# Allegro board Motot control.brd
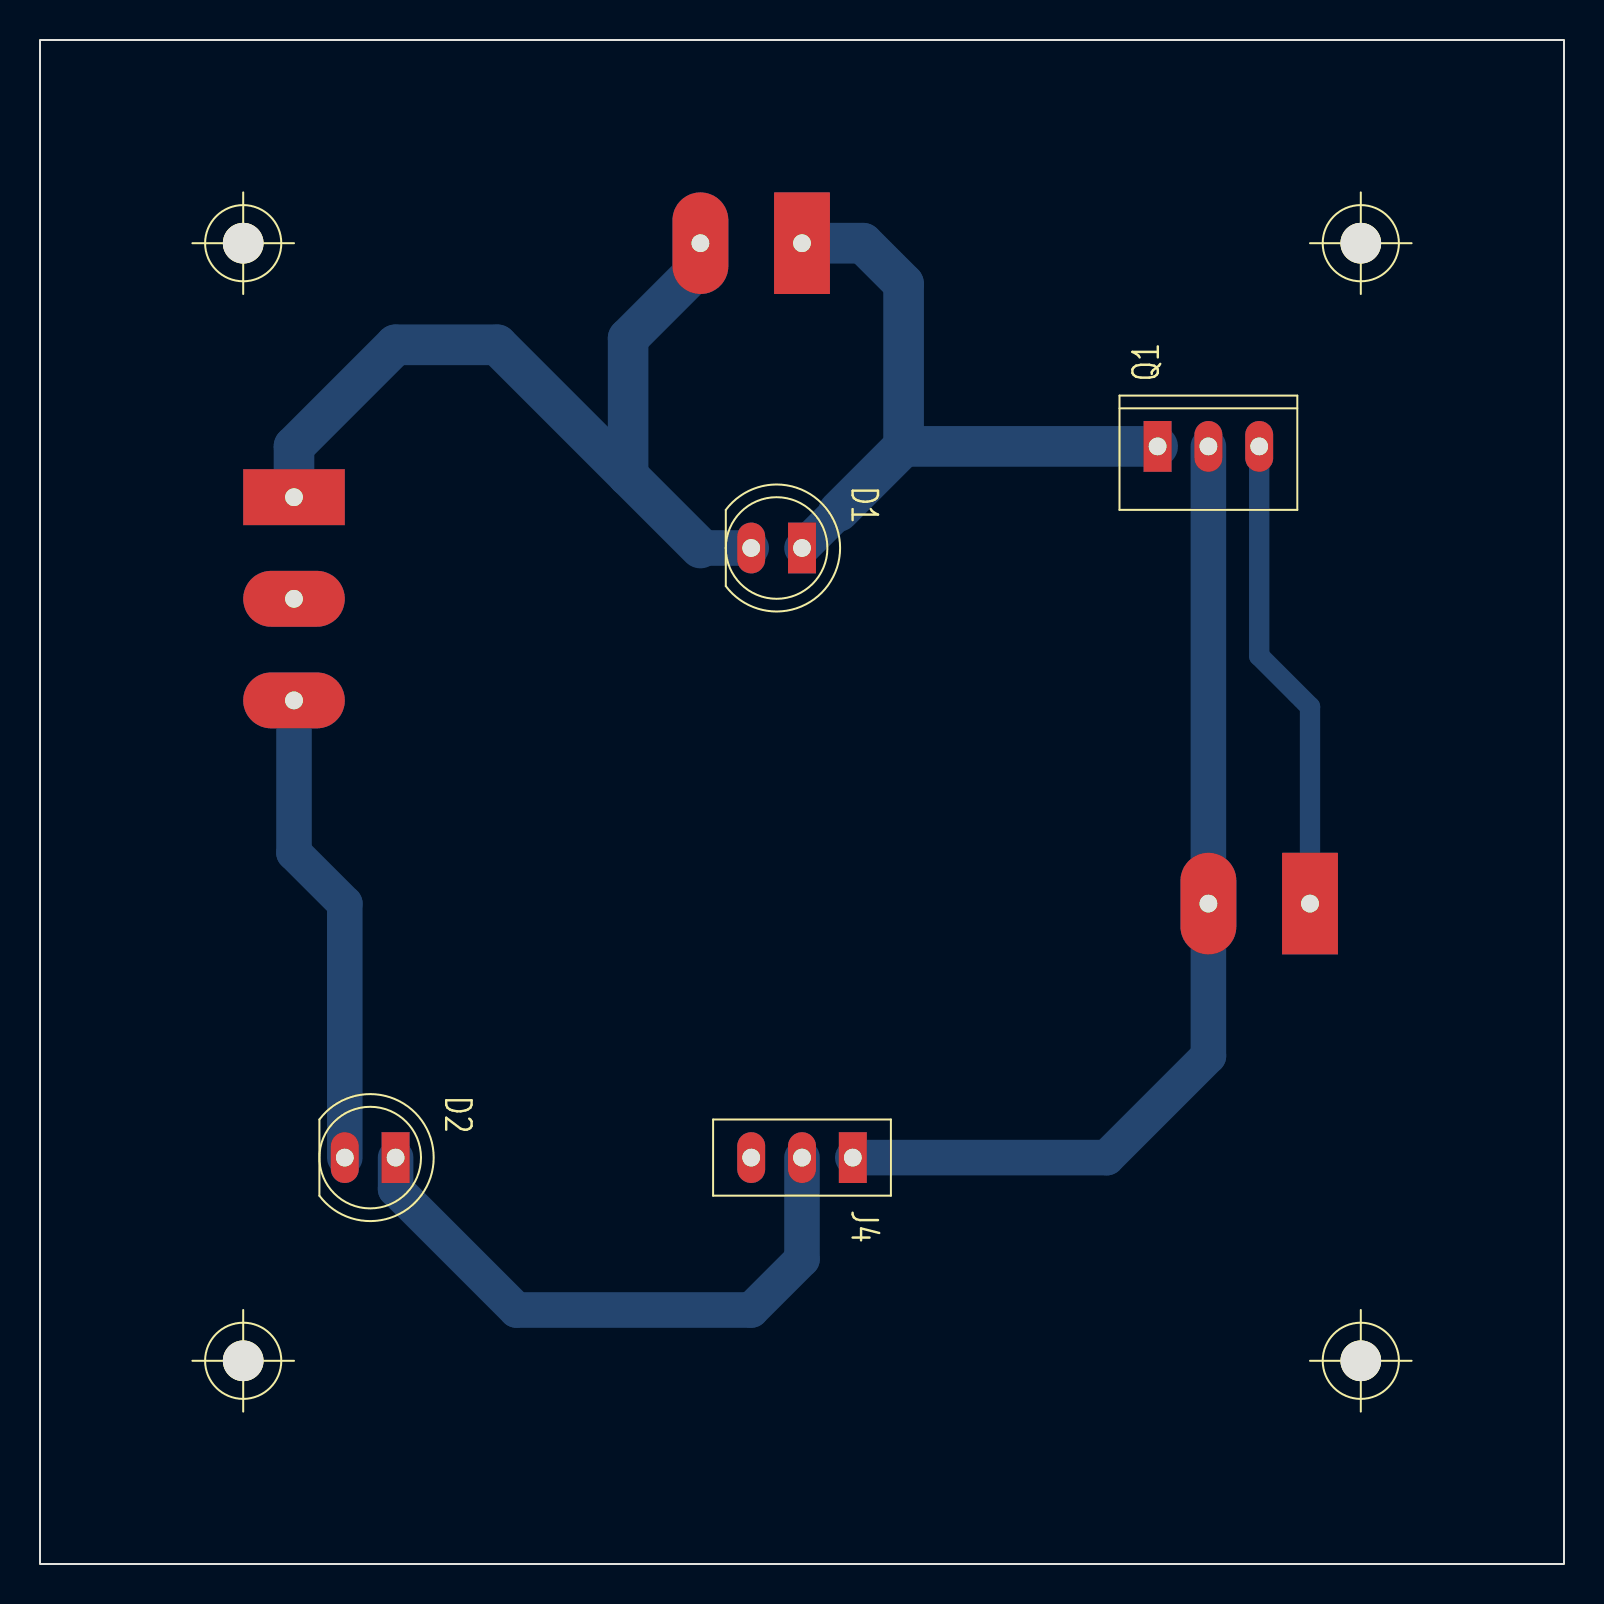
[diagram p0: board, top side]
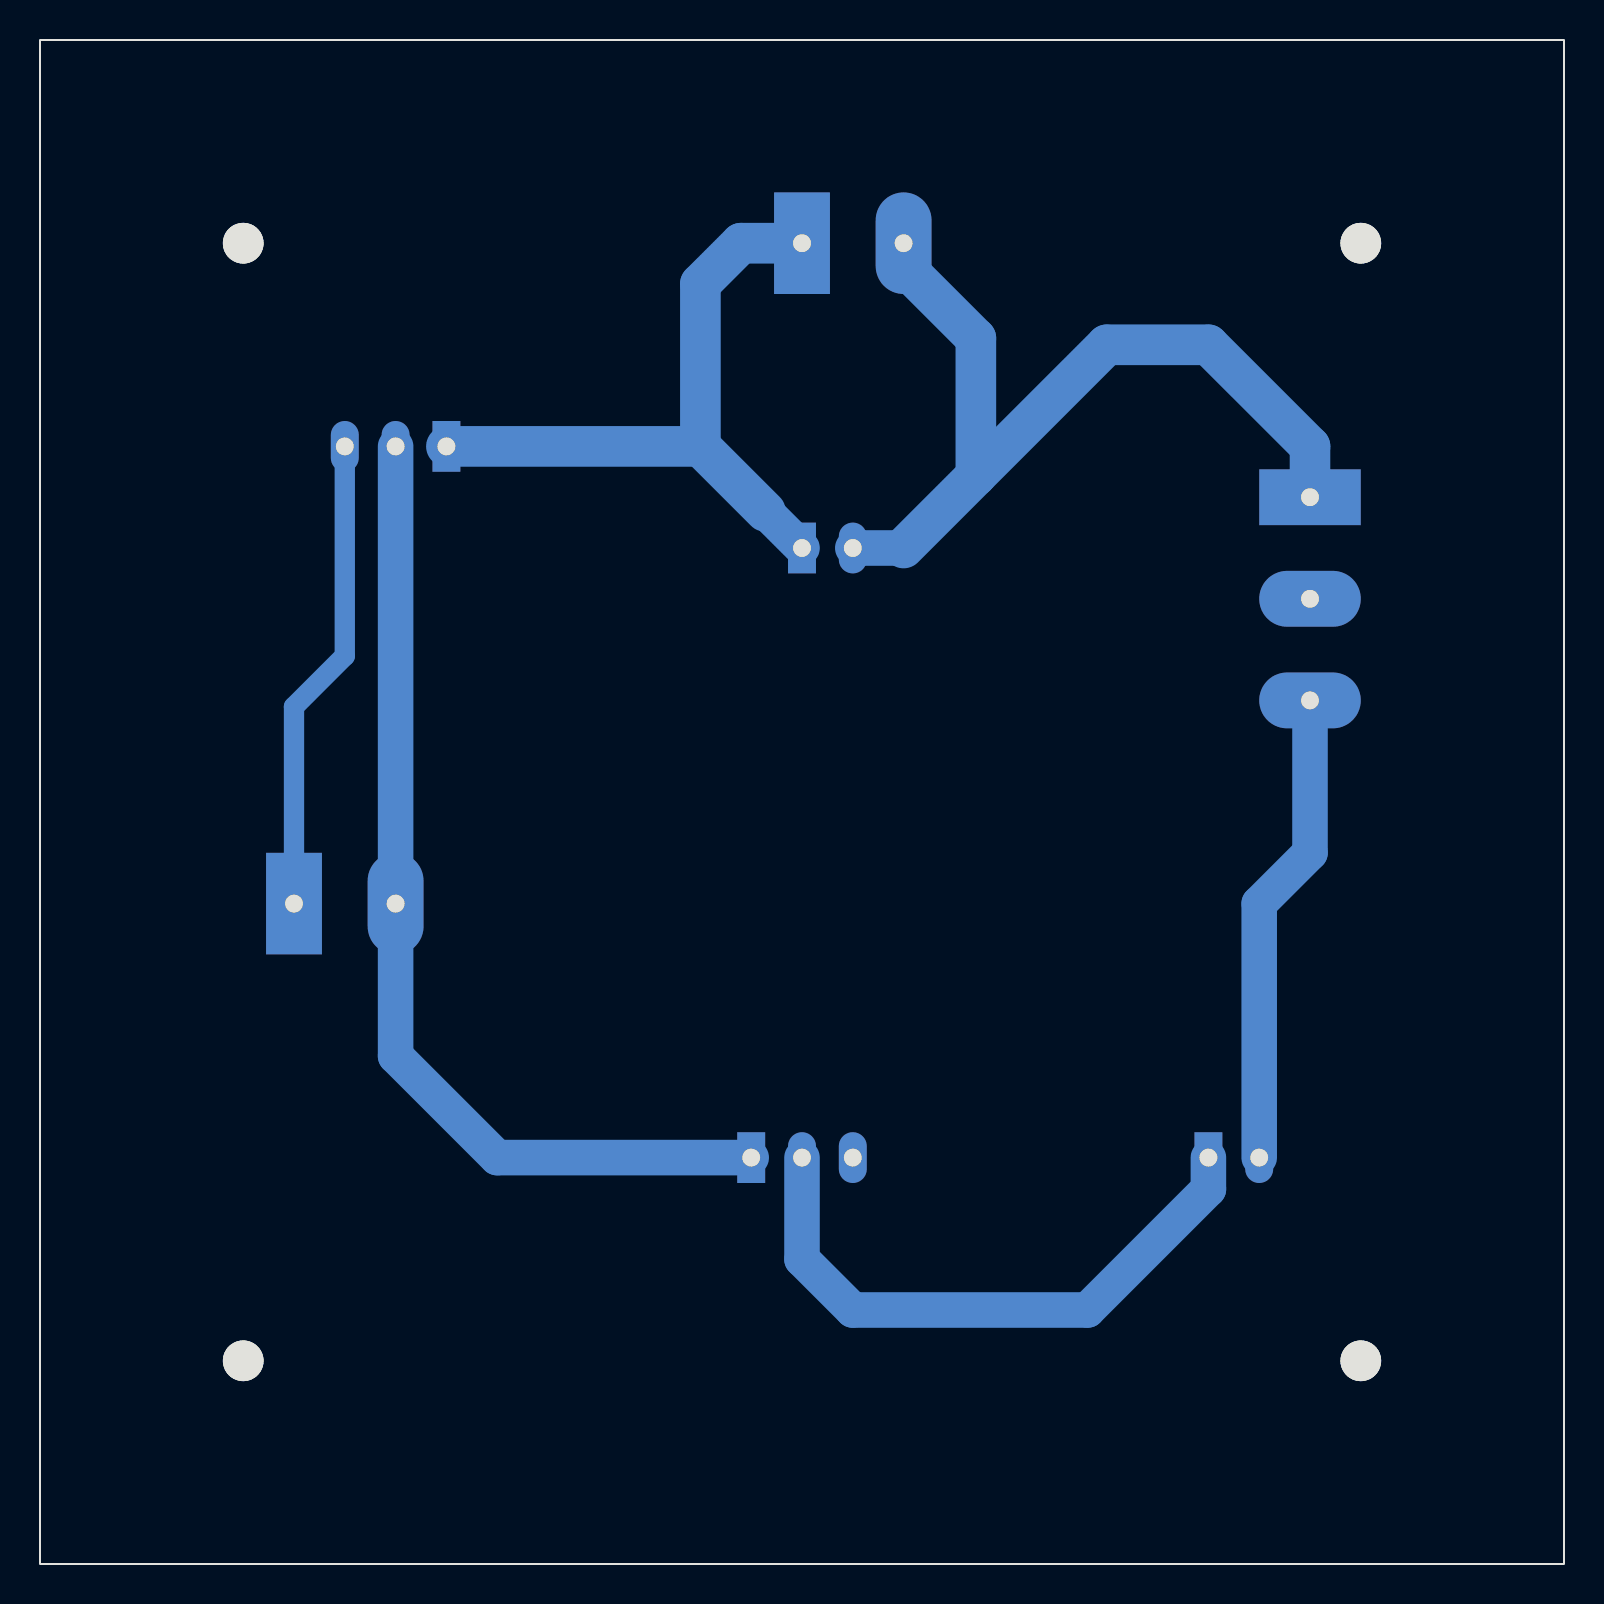
[diagram p1: board, bottom side, seen from below]

Outline 76.2 x 76.2 mm; copper layers: TOP, BOTTOM. Coordinates in mm from the lower left corner of the outline.
Outline path: rectangle 0,0 76.2,76.2

## Design rules (mm)
constraint set DEFAULT: min track width 0.635

## Placement (name value [footprint] x y rotation side)
D1  DIODE  [GU-LED5MM]  38.1 50.8 270 top
D2  DIODE  [GU-LED5MM]  17.78 20.32 270 top
J1  HEADER 3  [GU-TERMINAL3-200]  12.7 53.34 0 top
J2  HEADER 2  [GU-TERMINAL2-200]  38.1 66.04 270 top
J3  HEADER 2  [GU-TERMINAL2-200]  63.5 33.02 270 top
J4  HEADER 3  [GU-JUMPER3]  40.64 20.32 270 top
NOREF  -  [unnamed]  10.16 66.04 0 top
NOREF#2  -  [unnamed]  66.04 10.16 0 top
NOREF#3  -  [unnamed]  10.16 10.16 0 top
NOREF#4  -  [unnamed]  66.04 66.04 0 top
Q1  BFY51  [GU-MOLEX3]  55.88 55.88 90 top

## Library data of the parts
D1 D2 = DIODE
J1 = HEADER 3: User Part Number: TERMINAL3-200
J2 J3 = HEADER 2: User Part Number: TERMINAL2-200
J4 = HEADER 3
Q1 = BFY51

## Footprints (pads in the part's own frame, mm; a bottom-side part is the same pattern mirrored in y, then rotated)
GU-JUMPER3
  rect 2.54x1.397 hole 0.889: 1(0,0)
  oval 2.54x1.397 hole 0.889: 2(0,-2.54) 3(0,-5.08)
GU-LED5MM
  rect 2.54x1.397 hole 0.889: 1(0,0)
  oval 2.54x1.397 hole 0.889: 2(0,-2.54)
GU-MOLEX3
  rect 2.54x1.397 hole 0.889: 1(0,0)
  oval 2.54x1.397 hole 0.889: 2(0,-2.54) 3(0,-5.08)
GU-TERMINAL2-200
  rect 5.08x2.794 hole 0.889: 1(0,0)
  oval 5.08x2.794 hole 0.889: 2(0,-5.08)
GU-TERMINAL3-200
  rect 5.08x2.794 hole 0.889: 1(0,0)
  oval 5.08x2.794 hole 0.889: 2(0,-5.08) 3(0,-10.16)
unnamed
  round 2.032 hole 3.962 unplated: (0,0)

## Nets
GND_POWER: J3.2 J4.1 Q1.2
N00225: D1.2(K) J1.1 J2.2
N00237: D1.1 J2.1 Q1.1(EMITTER)
N00241: J3.1 Q1.3
N00263: D2.2(K) J1.3
N00753: D2.1 J4.2

Pads without a net: J1 2; J4 3

## Routing (per net, layer and track width the routed paths; a pad name or vN(x,y) marks a point on that pad's centre or on a via; arc(x,y) is an arc through that point)
GND_POWER: length 50.4
  BOTTOM w1.778: J4.1 53.34,20.32 58.42,25.4 J3.2 Q1.2
N00225: length 44.8
  BOTTOM w1.778: D1.2 33.02,50.8
  BOTTOM w2.032: J1.1 12.7,55.88 17.78,60.96 22.86,60.96 29.41,54.41 ; J2.2 33.02,64.9 29.41,61.28 29.41,54.41 ; 33.02,50.8 29.41,54.41
N00237: length 33.9
  BOTTOM w1.778: D1.1 39.93,52.63
  BOTTOM w2.032: 39.93,52.63 43.18,55.88 ; 43.18,55.88 Q1.1 ; 43.18,55.88 43.18,64.01 41.15,66.04 J2.1
N00241: length 23.9
  BOTTOM w1.016: J3.1 63.5,42.86 60.96,45.4 Q1.3
N00263: length 23.9
  BOTTOM w1.778: J1.3 12.7,35.56 15.24,33.02 D2.2
N00753: length 30.5
  BOTTOM w1.778: D2.1 17.78,18.75 23.83,12.7 35.56,12.7 38.1,15.24 J4.2
